# EAGLE board aircopter-v2 (EAGLE 9.4.0)
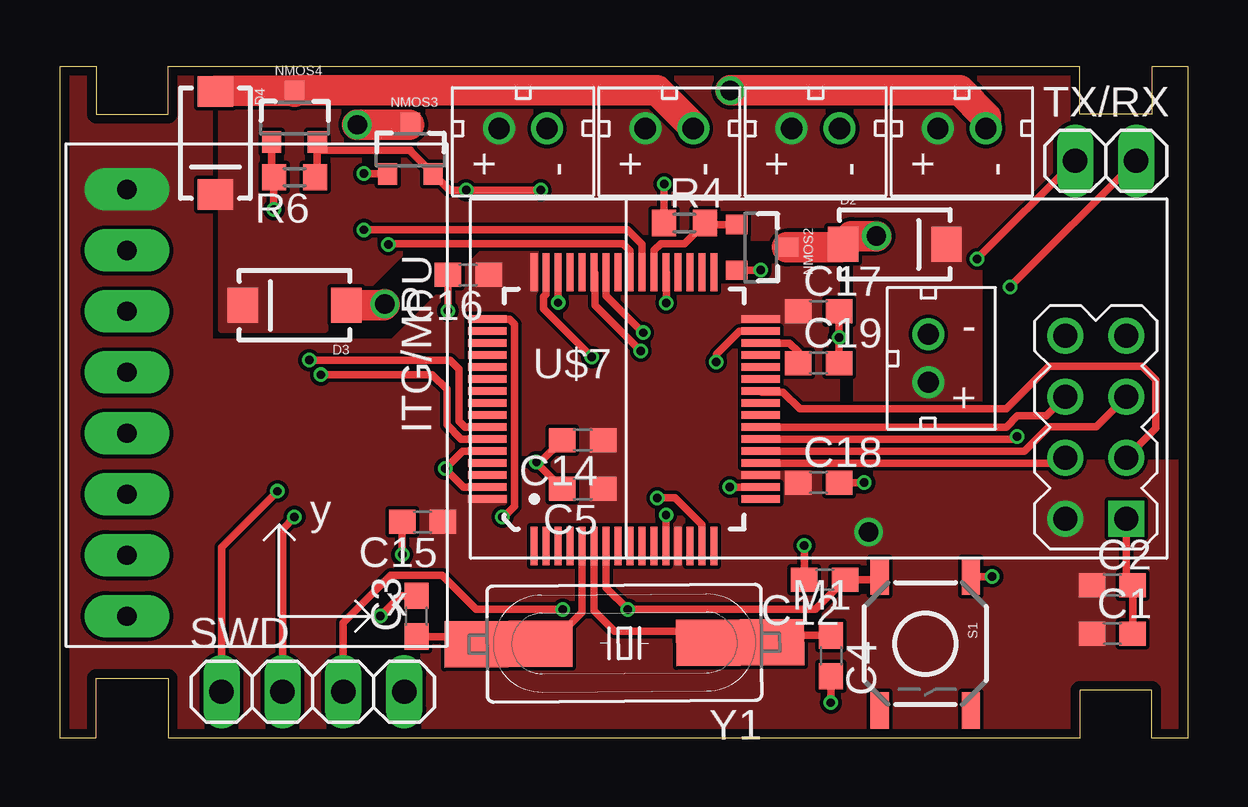
[diagram p0: board, top side]
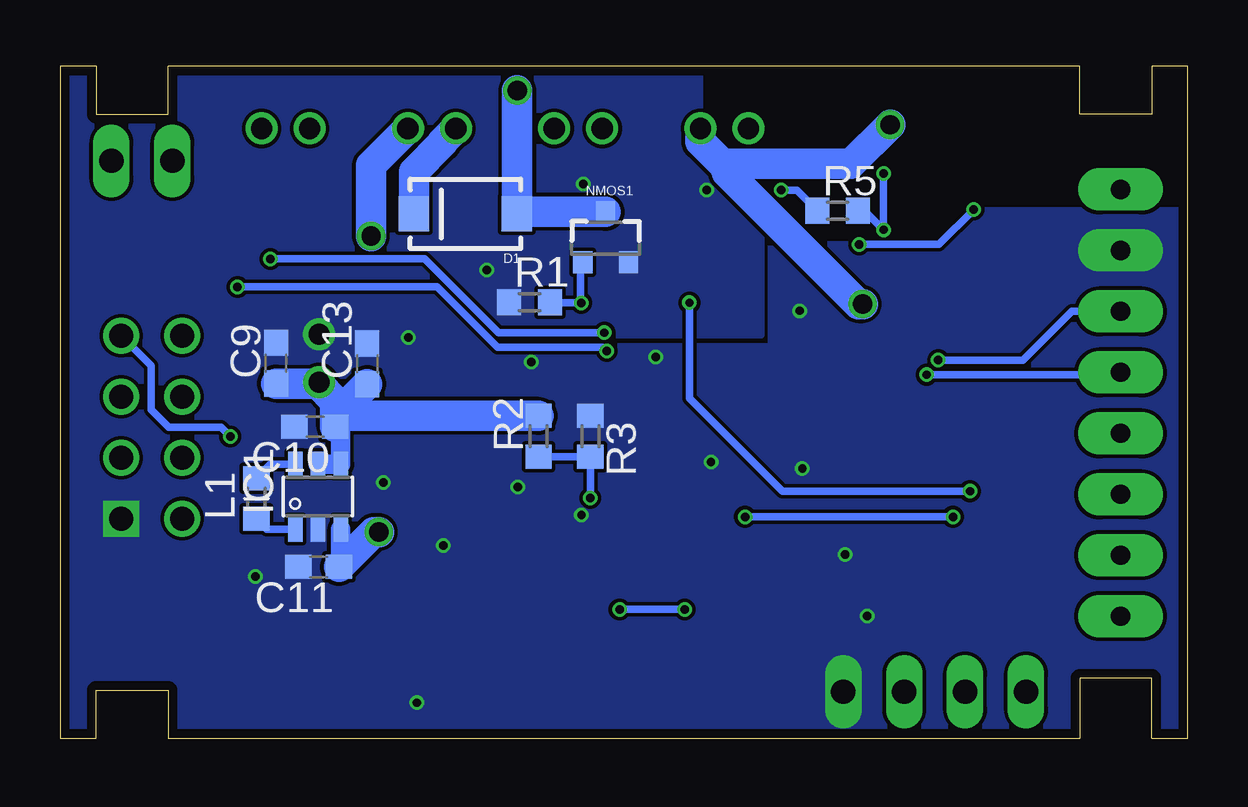
[diagram p1: board, bottom side, seen from below]

Size 47 x 28 mm. Coordinates in mm from the lower left corner, seen from the top.
Outline: 0,0 0,28 1.5,28 1.5,26 4.5,26 4.5,28 42.5,28 42.5,26 45.5,26 45.5,28 47,28 47,0 45.5,0 45.5,2 42.5,2 42.5,0 4.5,0 4.5,2.5 1.5,2.5 1.5,0 0,0
Copper layers (1*16): Top 0.035559375mm / dielectric 1.6mm / Bottom 0.035559375mm
Design rules "oshpark-2layer": minimum track width 6mil, minimum drill 10mil, track to track 6mil, track to pad 6mil, pad to pad 6mil, via to via 6mil, smd to smd 6mil, copper to edge 15mil, drill to drill 6mil, minimum pad ring 5mil, minimum via ring 5mil, stop-mask expansion 2.5mil, vias tented up to drill 0mil, thermal gap 10mil

## Footprints (pad centres in the part's own frame; a part is rotated, then mirrored left to right if it is on the bottom)
C0603 = smd 1.1 x 1: 1 -0.85,0; 2 0.85,0
SMA-DIODE = smd 1.27 x 1.47: A -2.15,0; C 2.15,0
SOT23-6 = smd 0.6 x 1.05: 1 -0.95,-1.35; 2 0,-1.35; 3 0.95,-1.35; 4 0.95,1.35; 5 0,1.35; 6 -0.95,1.35
L0603 = smd 1 x 1.1: 1 -0.85,0; 2 0.85,0
WIRELESS-NRF24L01 = drill 1 square: 1 -12.7,6.35 | drill 1: 2 -10.16,6.35; 3 -12.7,3.81; 4 -10.16,3.81; 5 -12.7,1.27; 6 -10.16,1.27; 7 -12.7,-1.27; 8 -10.16,-1.27
SOT23-3 = smd 0.8 x 0.9: 1 -0.95,-1; 2 0.95,-1; 3 0,1.1
R0603 = smd 1 x 1.1: 1 -0.85,0; 2 0.85,0
TACTILE-SWITCH-SMD = smd 1.524 x 0.762: 1 -2.794,1.905; 2 2.794,1.905; 3 -2.794,-1.905; 4 2.794,-1.905
1X04 = drill 1.016 long: 1 -3.81,0; 2 -1.27,0; 3 1.27,0; 4 3.81,0
1X02 = drill 1.016 long: 1 -1.27,0; 2 1.27,0
GY-521 = drill 0.8 pad 1.778 long: ADO -8.89,-6.35; GND -8.89,6.35; INT -8.89,-8.89; SCL -8.89,3.81; SDA -8.89,1.27; VCC -8.89,8.89; XCL -8.89,-3.81; XDA -8.89,-1.27
JST_CONNECTOR_FEMALE = drill 0.889: + 0,1; - 0,-1
LQFP64 = smd 0.3 x 1.6: 1 -3.75,-5.7; 2 -3.25,-5.7; 3 -2.75,-5.7; 4 -2.25,-5.7; 5 -1.75,-5.7; 6 -1.25,-5.7; 7 -0.75,-5.7; 8 -0.25,-5.7; 9 0.25,-5.7; 10 0.75,-5.7; 11 1.25,-5.7; 12 1.75,-5.7; 13 2.25,-5.7; 14 2.75,-5.7; 15 3.25,-5.7; 16 3.75,-5.7; 33 3.75,5.7; 34 3.25,5.7; 35 2.75,5.7; 36 2.25,5.7; 37 1.75,5.7; 38 1.25,5.7; 39 0.75,5.7; 40 0.25,5.7; 41 -0.25,5.7; 42 -0.75,5.7; 43 -1.25,5.7; 44 -1.75,5.7; 45 -2.25,5.7; 46 -2.75,5.7; 47 -3.25,5.7; 48 -3.75,5.7 | smd 1.6 x 0.3: 17 5.7,-3.75; 18 5.7,-3.25; 19 5.7,-2.75; 20 5.7,-2.25; 21 5.7,-1.75; 22 5.7,-1.25; 23 5.7,-0.75; 24 5.7,-0.25; 25 5.7,0.25; 26 5.7,0.75; 27 5.7,1.25; 28 5.7,1.75; 29 5.7,2.25; 30 5.7,2.75; 31 5.7,3.25; 32 5.7,3.75; 49 -5.7,3.75; 50 -5.7,3.25; 51 -5.7,2.75; 52 -5.7,2.25; 53 -5.7,1.75; 54 -5.7,1.25; 55 -5.7,0.75; 56 -5.7,0.25; 57 -5.7,-0.25; 58 -5.7,-0.75; 59 -5.7,-1.25; 60 -5.7,-1.75; 61 -5.7,-2.25; 62 -5.7,-2.75; 63 -5.7,-3.25; 64 -5.7,-3.75
HC49UP = smd 5.334 x 1.93: 1 -4.826,0; 2 4.826,0

## Placement (x,y rotation side)
C1  10uF  [C0603]  43.87,4.34 0 top
C2  100nF  [C0603]  43.87,6.38 0 top
C3  20pF  [C0603]  14.86,5.08 90 top
C4  20pF  [C0603]  32.13,3.43 270 top
C5  4.7uF  [C0603]  21.79,10.39 180 top
C9  100uF  [C0603]  38,15.62 90 bottom
C10  2.2uF  [C0603]  36.37,12.98 180 bottom
C11  10uF  [C0603]  36.22,7.14 180 bottom
C12  100nF  [C0603]  31.88,6.6 180 top
C13  1uF  [C0603]  34.19,15.6 90 bottom
C14  100nF  [C0603]  21.79,12.42 180 top
C15  100nF  [C0603]  15.11,9.02 180 top
C16  100nF  [C0603]  17.02,19.3 180 top
C17  100nF  [C0603]  31.62,17.78 0 top
C18  100nF  [C0603]  31.62,10.64 0 top
C19  4.7uF  [C0603]  31.62,15.62 0 top
D1  [SMA-DIODE]  30.1,21.84 180 bottom
D2  [SMA-DIODE]  34.8,20.57 0 top
D3  [SMA-DIODE]  9.78,18.03 180 top
D4  [SMA-DIODE]  6.48,24.79 270 top
IC1  STF202-22T1G  [SOT23-6]  36.25,10.06 0 bottom
L1  10uH  [L0603]  38.81,9.98 90 bottom
M1  WIRELESS-NRF24L01  [WIRELESS-NRF24L01]  31.75,15.49 180 top
NMOS1  N-CHANNEL-MOSFET-BSS138  [SOT23-3]  24.26,20.83 0 bottom
NMOS2  N-CHANNEL-MOSFET-BSS138  [SOT23-3]  29.21,20.45 270 top
NMOS3  N-CHANNEL-MOSFET-BSS138  [SOT23-3]  14.61,24.51 0 top
NMOS4  N-CHANNEL-MOSFET-BSS138  [SOT23-3]  9.78,25.83 0 top
R1  10k  [R0603]  27.43,18.16 0 bottom
R2  10k  [R0603]  27.05,12.57 90 bottom
R3  10k  [R0603]  24.89,12.57 270 bottom
R4  10k  [R0603]  26.04,21.46 0 top
R5  10k  [R0603]  14.58,21.97 0 bottom
R6  10k  [R0603]  9.78,23.37 180 top
S1  SWITCH-MOMENTARY-2SMD  [TACTILE-SWITCH-SMD]  36.07,3.94 270 top
SWD  [1X04]  10.54,1.93 0 top
TX/RX  [1X02]  43.59,24.05 0 top
U2  GY-521MPU6050  [GY-521]  11.68,13.97 0 top
U$2  JST_CONNECTOR_FEMALE  [JST_CONNECTOR_FEMALE]  37.59,25.4 90 top
U$3  JST_CONNECTOR_FEMALE  [JST_CONNECTOR_FEMALE]  31.5,25.4 90 top
U$4  JST_CONNECTOR_FEMALE  [JST_CONNECTOR_FEMALE]  19.3,25.4 90 top
U$5  JST_CONNECTOR_FEMALE  [JST_CONNECTOR_FEMALE]  25.4,25.4 90 top
U$6  JST_CONNECTOR_FEMALE  [JST_CONNECTOR_FEMALE]  36.2,15.82 180 top
U$7  STM32F411XC  [LQFP64]  23.51,13.71 0 top
Y1  20 MHz  [HC49UP]  23.52,3.95 180.4 top

## Library data of the parts
C1-C5 C9-C19 = rcl; SPICEPREFIX: C
D1-D4 L1 = BeagleBone_Blue_R3
IC1 = stf202_10; MF: ON Semiconductor; MPN: STF202-22T1G; OC_FARNELL: 1651958; OC_NEWARK: 45J2271
M1 = AP_quad
NMOS1-NMOS4 = AP_quad; DATASHEET: http://www.fairchildsemi.com/ds/BS/BSS138.pdf; DIGIKEY: BSS138TR-ND; ELEMENT14: 2323154; URL: http://au.element14.com/fairchild-semiconductor/bss138/mosfet-n-ch-50v-220ma-sot-23/dp/2323154
R1-R6 = rcl; SPICEPREFIX: R
S1 = AP_quad; PROD_ID: SWCH-08247
SWD TX/RX = pinhead
U2 U$2-U$7 Y1 = Aircopter_quad_lib

## Nets
3V3: C1.1 C2.1 C5.1 C11.1 C14.1 C15.1 C16.1 C17.1 C18.1 IC1.3 M1.2 U2.VCC U$7.13 U$7.19 U$7.32 U$7.48 U$7.64
3V7: C9.1 C10.1 C13.1 D1.C D2.C D3.C D4.C IC1.4 IC1.5 R2.2 U$2.+ U$3.+ U$4.+ U$5.+ U$6.+
CE: M1.3 U$7.26
CSN: M1.4 U$7.20
GND: C1.2 C2.2 C3.2 C4.2 C5.2 C9.2 C10.2 C11.2 C12.2 C13.2 C14.2 C15.2 C16.2 C17.2 C18.2 C19.2 IC1.2 M1.1 NMOS1.2 NMOS2.2 NMOS3.2 NMOS4.2 R1.1 R3.1 R4.1 R5.1 R6.1 S1.1 SWD.4 U2.GND U$6.- U$7.12 U$7.18 U$7.31 U$7.47 U$7.60 U$7.63
MISO: M1.7 U$7.22
MOSI: M1.6 U$7.23
N$1: D1.A NMOS1.3 U$2.-
N$2: D2.A NMOS2.3 U$3.-
N$3: D3.A NMOS3.3 U$4.-
N$4: D4.A NMOS4.3 U$5.-
N$5: IC1.1 L1.1
N$6: IC1.6 L1.2
N$7: C19.1 U$7.30
OSC0: C3.1 U$7.5 Y1.2
OSC1: C4.1 U$7.6 Y1.1
PWM1: NMOS1.1 R1.2 U$7.37
PWM2: NMOS2.1 R4.2 U$7.38
PWM3: NMOS3.1 R5.2 U$7.39
PWM4: NMOS4.1 R6.2 U$7.40
RST: C12.1 S1.3 SWD.3 U$7.7
RX: TX/RX.2 U$7.43
SCK: M1.5 U$7.21
SCL: U2.SCL U$7.58
SDA: U2.SDA U$7.59
SWCLK: SWD.2 U$7.49
SWDIO: SWD.1 U$7.46
TX: TX/RX.1 U$7.42
VDIV: R2.1 R3.2 U$7.15

## Tracks (layer width: path | path; a pad name or v marks a point on that pad's centre or on a via)
3V3  (via drill 0.8)
  Bottom 0.813: C11.1 35.3,7.21 IC1.3
  Bottom 1.27: v33.71,8.59 33.92,8.59 C11.1
  pour Top (no thermals): 6.22,28.17 6.22,16.48 13.89,16.48 17.68,20.27 32.36,20.27 32.36,11.48 32.33,11.46 47.24,11.46 47.24,-0.2 -0.28,-0.2 -0.28,28.17
3V7
  Bottom 0.813: IC1.5 IC1.4 35.3,12.75 C10.1
  Bottom 1.27: C9.1 36.25,14.77 | 36.25,14.77 U$6.+ | 35.52,14.05 C10.1 35.52,13.41 C13.1 | R2.2 34.9,13.42 35.52,14.05 | 35.52,14.05 36.25,14.77 | U$3.+ 31.04,24.85 31.04,24.8 32.25,23.59 D1.C
  pour Top (no thermals): 6.73,17.04 11.02,17.04 14.86,20.88 33.22,20.88 33.22,13.31 38.3,13.31 38.3,20.02 42.34,24.05 42.34,28.14 6.73,28.14
CE
  Top 0.305: U$7.26 29.26,14.41 30.14,14.41 30.84,13.72 39.45,13.72 41.22,15.49 45.11,15.49 45.67,14.94 45.67,12.9 M1.3
CSN
  Top 0.305: M1.4 41.69,11.46 U$7.20
GND  (via drill 0.35)
  Top 0.305: C1.2 C2.2 44.45,6.64 M1.1 | NMOS4.2 10.73,24.46 | 10.73,24.46 10.73,23.47 R6.1 | 10.73,24.46 10.75,24.49 14.61,24.49 14.61,24.46 NMOS3.2 16.23,22.83 v16.93,22.83 v20.04,22.83 | R4.1 v25.18,23.09 | NMOS2.2 v29.21,19.5 | C17.2 v32.47,16.69 C19.2 | C18.2 v33.53,10.64 | U$7.18 v27.91,10.46 | C12.2 v31.03,8.03 | S1.1 v38.86,6.73 | U$7.12 v25.26,9.3 | C4.2 v32.13,1.47 | C5.2 19.83,11.51 v19.86,11.51 20.03,11.51 C14.2 | C15.2 v14.26,7.64 | C3.2 14.2,5.93 13.36,5.09 v13.36,5.08 | C16.2 v16.17,17.8 | U$7.63 16.82,10.46 v16.05,11.22 | v16.05,11.22 v16.05,11.23 | v16.05,11.22 16.79,11.96 U$7.60 | U$7.31 28.33,16.96 27.36,15.98 v27.36,15.68 | U$7.47 20.26,18.5 20.16,18.39 20.16,17.89 v22.17,15.88
  Bottom 0.305: R5.1 16.29,22.83 v16.93,22.83
  pour Bottom (no thermals): 20.35,28.22 20.35,24.79 17.78,22.23 17.78,16.81 28.73,16.81 28.73,16.31 17.53,16.31 17.5,16.28 17.48,16.31 17.35,16.31 17.35,20.55 10.39,20.55 9.32,21.62 8.97,21.97 -0.28,21.97 -0.28,-0.2 47.24,-0.2 47.29,-0.15 47.29,28.22 47.24,28.27 20.32,28.27
MISO  (via drill 0.35)
  Top 0.305: U$7.22 39.79,12.45 v39.9,12.57
  Bottom 0.305: v39.9,12.57 40.29,12.95 42.47,12.95 43.2,13.69 43.2,15.52 M1.7
MOSI
  Top 0.305: M1.6 41.12,13.44 39.91,13.44 39.44,12.96 U$7.23
N$1  (via drill 0.8)
  Top 1.27: U$2.- 38.59,25.9 37.51,26.98 v27.94,26.98
  Bottom 1.27: NMOS1.3 27.86,21.93 | 27.86,21.93 D1.A | v27.94,26.98 27.94,22 27.86,21.93
N$2  (via drill 0.8)
  Top 1.27: NMOS2.3 32.52,20.45 D2.A 32.99,20.92 v34.04,20.92
  Bottom 1.27: v34.04,20.92 34.04,23.86 U$3.-
N$3  (via drill 0.8)
  Top 0.813: NMOS3.3 14.55,25.56
  Top 1.27: v13.54,18.09 13.49,18.03 D3.A | 14.55,25.56 v12.39,25.56
  Bottom 1.27: U$4.- 20.3,24.84 19.39,23.92 | 19.39,23.92 19.03,23.57 19.21,23.57 13.72,18.09 v13.54,18.09 | v12.39,25.56 14.03,23.92 19.39,23.92
N$4
  Top 1.27: U$5.- 26.4,25.47 24.89,26.98 9.78,26.98 NMOS4.3 9.74,26.97 6.5,26.97 D4.A
N$5
  Bottom 0.305: IC1.1 38.39,8.71 L1.1
N$6
  Bottom 0.305: IC1.6 38.23,11.41 L1.2
N$7
  Top 0.305: U$7.30 30.4,16.46 30.77,16.09 C19.1
OSC0
  Top 0.305: U$7.5 21.76,5.25 20.43,3.92 Y1.2 18.38,4.23 16.1,4.23 C3.1
OSC1
  Top 0.305: U$7.6 22.26,5.3 23.11,4.45 26.52,4.45 26.64,4.57 27.76,4.57 Y1.1 28.64,4.28 C4.1
PWM1  (via drill 0.35)
  Top 0.305: U$7.37 25.27,19.4 v25.27,18.14
  Bottom 0.305: R1.2 26.56,18.14 v25.27,18.14 25.3,18.16 25.3,19.74 NMOS1.1
PWM2
  Top 0.305: NMOS2.1 26.95,21.4 R4.2 26.02,20.6 25.04,20.6 24.76,20.32 U$7.38
PWM3  (via drill 0.35)
  Top 0.305: U$7.39 24.26,20.57 23.66,21.18 v12.68,21.18 | v12.68,23.52 13.65,23.52 NMOS3.1
  Bottom 0.305: v12.68,23.52 v12.68,21.18 13.46,21.97 R5.2
PWM4  (via drill 0.35)
  Top 0.305: U$7.40 23.76,20.31 23.47,20.6 13.72,20.6 v13.69,20.57 | NMOS4.1 8.83,23.47 R6.2 8.91,23.35 v8.91,22.02
  Bottom 0.305: v13.69,20.57 10.36,20.57 v8.91,22.02
RST  (via drill 0.35)
  Top 0.305: S1.3 34.04,6.6 C12.1 31.48,5.36 v23.67,5.36 22.76,6.27 U$7.7 | SWD.3 11.81,4.81 13.78,6.79 15.92,6.79 17.35,5.36 v20.95,5.36
  Bottom 0.305: v23.67,5.36 v20.95,5.36
RX  (via drill 0.35)
  Top 0.305: U$7.43 22.3,19.37 22.3,18.04 v24.21,16.13 | TX/RX.2 v39.6,18.8
  Bottom 0.305: v24.21,16.13 24.36,16.28 28.77,16.28 31.28,18.8 v39.6,18.8
SCK
  Top 0.305: M1.5 43.2,12.98 41.22,12.98 40.2,11.96 U$7.21
SCL  (via drill 0.35)
  Top 0.305: U$7.58 16.89,12.96 16.64,13.21 16.64,15.37 16.26,15.75 v10.39,15.75
  Bottom 0.305: v10.39,15.75 6.86,15.75 4.83,17.78 U2.SCL
SDA  (via drill 0.35)
  Top 0.305: U$7.59 16.73,12.46 16.13,13.06 16.13,14.53 15.52,15.14 v10.87,15.14
  Bottom 0.305: v10.87,15.14 2.89,15.14 U2.SDA
SWCLK  (via drill 0.35)
  Top 0.305: U$7.49 18.73,17.46 18.95,17.25 18.95,9.65 18.52,9.22 v18.44,9.22 | v9.78,9.22 9.27,8.71 SWD.2
  Bottom 0.305: v18.44,9.22 v9.78,9.22
SWDIO  (via drill 0.35)
  Top 0.305: U$7.46 v20.76,18.14 | v9.07,10.29 6.73,7.95 SWD.1
  Bottom 0.305: v20.76,18.14 20.76,14.16 16.89,10.29 v9.07,10.29
TX  (via drill 0.35)
  Top 0.305: U$7.42 22.76,18.44 v24.31,16.89 | TX/RX.1 v38.23,19.96
  Bottom 0.305: v24.31,16.89 28.73,16.89 31.8,19.96 v38.23,19.96
VDIV  (via drill 0.35)
  Top 0.305: v24.89,10.01 25.64,10.01 26.76,8.89 U$7.15
  Bottom 0.305: R2.1 R3.2 v24.89,10.01